# EAGLE board Stencil (EAGLE 8.3.2)

Size 25.4 x 25.4 mm. Coordinates in mm from the lower left corner, seen from the top.
Outline: 0,2.17 0,23.23 arc-90 2.17,25.4 23.23,25.4 arc-90 25.4,23.23 25.4,2.17 arc-90 23.23,0 2.17,0 arc-90 0,2.17
Copper layers (1*16): Top 0.035mm / dielectric 1.5mm / Bottom 0.035mm
Design rules "default": minimum track width 6mil, minimum drill 0.35mm, track to track 6mil, track to pad 6mil, pad to pad 6mil, via to via 6mil, smd to smd 6mil, copper to edge 40mil, drill to drill 6mil, minimum pad ring 10mil, minimum via ring 8mil, stop-mask expansion 4mil, vias tented up to drill 0mil, thermal gap 10mil
Holes 5.08 mm at 20.32,20.32 52.07,20.32 52.07,52.07 20.32,52.07 83.82,20.32 83.82,52.07 115.57,20.32 115.57,52.07 147.32,20.32 147.32,52.07 179.07,20.32 179.07,52.07 210.82,20.32 210.82,52.07 242.57,20.32 242.57,52.07 274.32,20.32 274.32,52.07 306.07,20.32 306.07,52.07 52.07,83.82 20.32,83.82 83.82,83.82 115.57,83.82 147.32,83.82 179.07,83.82 210.82,83.82 242.57,83.82 274.32,83.82 306.07,83.82 52.07,115.57 20.32,115.57 83.82,115.57 115.57,115.57 147.32,115.57 179.07,115.57 210.82,115.57 242.57,115.57 274.32,115.57 306.07,115.57 52.07,147.32 20.32,147.32 83.82,147.32 115.57,147.32 147.32,147.32 179.07,147.32 210.82,147.32 242.57,147.32 274.32,147.32 306.07,147.32

## Footprints (pad centres in the part's own frame; a part is rotated, then mirrored left to right if it is on the bottom)
D016_M = smd 2.5 x 0.7: 1 -2.45,4.445; 2 -2.45,3.175; 3 -2.45,1.905; 4 -2.45,0.635; 5 -2.45,-0.635; 6 -2.45,-1.905; 7 -2.45,-3.175; 8 -2.45,-4.445; 9 2.45,-4.445; 10 2.45,-3.175; 11 2.45,-1.905; 12 2.45,-0.635; 13 2.45,0.635; 14 2.45,1.905; 15 2.45,3.175; 16 2.45,4.445
DB024 = smd 0.4 x 2.15: 1 -3.575,-3.275; 2 -2.925,-3.275; 3 -2.275,-3.275; 4 -1.625,-3.275; 5 -0.975,-3.275; 6 -0.325,-3.275; 7 0.325,-3.275; 8 0.975,-3.275; 9 1.625,-3.275; 10 2.275,-3.275; 11 2.925,-3.275; 12 3.575,-3.275; 13 3.575,3.275; 14 2.925,3.275; 15 2.275,3.275; 16 1.625,3.275; 17 0.975,3.275; 18 0.325,3.275; 19 -0.325,3.275; 20 -0.975,3.275; 21 -1.625,3.275; 22 -2.275,3.275; 23 -2.925,3.275; 24 -3.575,3.275
DBQ024 = smd 0.4 x 1.95: 1 -3.52,-2.6; 2 -2.88,-2.6; 3 -2.24,-2.6; 4 -1.6,-2.6; 5 -0.96,-2.6; 6 -0.32,-2.6; 7 0.32,-2.6; 8 0.96,-2.6; 9 1.6,-2.6; 10 2.24,-2.6; 11 2.88,-2.6; 12 3.52,-2.6; 13 3.52,2.6; 14 2.88,2.6; 15 2.24,2.6; 16 1.6,2.6; 17 0.96,2.6; 18 0.32,2.6; 19 -0.32,2.6; 20 -0.96,2.6; 21 -1.6,2.6; 22 -2.24,2.6; 23 -2.88,2.6; 24 -3.52,2.6
DBT28 = smd 0.3 x 1.65: 1 -3.25,-2.775; 2 -2.75,-2.775; 3 -2.25,-2.775; 4 -1.75,-2.775; 5 -1.25,-2.775; 6 -0.75,-2.775; 7 -0.25,-2.775; 8 0.25,-2.775; 9 0.75,-2.775; 10 1.25,-2.775; 11 1.75,-2.775; 12 2.25,-2.775; 13 2.75,-2.775; 14 3.25,-2.775; 15 3.25,2.775; 16 2.75,2.775; 17 2.25,2.775; 18 1.75,2.775; 19 1.25,2.775; 20 0.75,2.775; 21 0.25,2.775; 22 -0.25,2.775; 23 -0.75,2.775; 24 -1.25,2.775; 25 -1.75,2.775; 26 -2.25,2.775; 27 -2.75,2.775; 28 -3.25,2.775
DGG048 = smd 0.3 x 1.65: 1 -5.75,-3.625; 2 -5.25,-3.625; 3 -4.75,-3.625; 4 -4.25,-3.625; 5 -3.75,-3.625; 6 -3.25,-3.625; 7 -2.75,-3.625; 8 -2.25,-3.625; 9 -1.75,-3.625; 10 -1.25,-3.625; 11 -0.75,-3.625; 12 -0.25,-3.625; 13 0.25,-3.625; 14 0.75,-3.625; 15 1.25,-3.625; 16 1.75,-3.625; 17 2.25,-3.625; 18 2.75,-3.625; 19 3.25,-3.625; 20 3.75,-3.625; 21 4.25,-3.625; 22 4.75,-3.625; 23 5.25,-3.625; 24 5.75,-3.625; 25 5.75,3.625; 26 5.25,3.625; 27 4.75,3.625; 28 4.25,3.625; 29 3.75,3.625; 30 3.25,3.625; 31 2.75,3.625; 32 2.25,3.625; 33 1.75,3.625; 34 1.25,3.625; 35 0.75,3.625; 36 0.25,3.625; 37 -0.25,3.625; 38 -0.75,3.625; 39 -1.25,3.625; 40 -1.75,3.625; 41 -2.25,3.625; 42 -2.75,3.625; 43 -3.25,3.625; 44 -3.75,3.625; 45 -4.25,3.625; 46 -4.75,3.625; 47 -5.25,3.625; 48 -5.75,3.625
DGV048 = smd 0.25 x 1.65: 1 -4.6,-2.775; 2 -4.2,-2.775; 3 -3.8,-2.775; 4 -3.4,-2.775; 5 -3,-2.775; 6 -2.6,-2.775; 7 -2.2,-2.775; 8 -1.8,-2.775; 9 -1.4,-2.775; 10 -1,-2.775; 11 -0.6,-2.775; 12 -0.2,-2.775; 13 0.2,-2.775; 14 0.6,-2.775; 15 1,-2.775; 16 1.4,-2.775; 17 1.8,-2.775; 18 2.2,-2.775; 19 2.6,-2.775; 20 3,-2.775; 21 3.4,-2.775; 22 3.8,-2.775; 23 4.2,-2.775; 24 4.6,-2.775; 25 4.6,2.775; 26 4.2,2.775; 27 3.8,2.775; 28 3.4,2.775; 29 3,2.775; 30 2.6,2.775; 31 2.2,2.775; 32 1.8,2.775; 33 1.4,2.775; 34 1,2.775; 35 0.6,2.775; 36 0.2,2.775; 37 -0.2,2.775; 38 -0.6,2.775; 39 -1,2.775; 40 -1.4,2.775; 41 -1.8,2.775; 42 -2.2,2.775; 43 -2.6,2.775; 44 -3,2.775; 45 -3.4,2.775; 46 -3.8,2.775; 47 -4.2,2.775; 48 -4.6,2.775
WSON8-6X5MM = smd 0.5 x 1.4: 1 -1.905,-3; 2 -0.635,-3; 3 0.635,-3; 4 1.905,-3; 5 1.905,3; 6 0.635,3; 7 -0.635,3; 8 -1.905,3 | smd 4.3 x 3.4: EP 0,0
DL028 = smd 0.4 x 2.2: 1 -4.128,-4.7; 2 -3.493,-4.7; 3 -2.857,-4.7; 4 -2.223,-4.7; 5 -1.587,-4.7; 6 -0.953,-4.7; 7 -0.318,-4.7; 8 0.318,-4.7; 9 0.953,-4.7; 10 1.587,-4.7; 11 2.223,-4.7; 12 2.857,-4.7; 13 3.493,-4.7; 14 4.128,-4.7; 15 4.128,4.7; 16 3.493,4.7; 17 2.857,4.7; 18 2.223,4.7; 19 1.587,4.7; 20 0.953,4.7; 21 0.318,4.7; 22 -0.318,4.7; 23 -0.953,4.7; 24 -1.587,4.7; 25 -2.223,4.7; 26 -2.857,4.7; 27 -3.493,4.7; 28 -4.128,4.7
R0402 = smd 0.7 x 0.9: 1 -0.65,0; 2 0.65,0
CRYSTAL-SMD-2.0X1.6MM = smd 0.75 x 0.7: 1 -0.675,-0.5; 2 0.675,-0.5; 3 0.675,0.5; 4 -0.675,0.5
FN28_M = smd 0.7 x 2.6: 1 0,5.6; 2 -1.27,5.6; 3 -2.54,5.6; 4 -3.81,5.6; 12 -3.81,-5.6; 13 -2.54,-5.6; 14 -1.27,-5.6; 15 0,-5.6; 16 1.27,-5.6; 17 2.54,-5.6; 18 3.81,-5.6; 26 3.81,5.6; 27 2.54,5.6; 28 1.27,5.6 | smd 2.6 x 0.7: 5 -5.6,3.81; 6 -5.6,2.54; 7 -5.6,1.27; 8 -5.6,0; 9 -5.6,-1.27; 10 -5.6,-2.54; 11 -5.6,-3.81; 19 5.6,-3.81; 20 5.6,-2.54; 21 5.6,-1.27; 22 5.6,0; 23 5.6,1.27; 24 5.6,2.54; 25 5.6,3.81
CRYSTAL-SMD-3.2X2.5MM = smd 1.2 x 1.1: 1 -1.175,-0.875; 2 1.175,-0.875; 3 1.175,0.875; 4 -1.175,0.875
CRYSTAL-SMD-5X3.2-4PAD = smd 1.9 x 1.1: 1 -1.85,-1.15; 2 1.85,-1.15; 3 1.85,1.15; 4 -1.85,1.15
HC49UP = smd 5.334 x 1.93: 1 -4.826,0; 2 4.826,0
RESONATOR-SMD-7.4X3.4 = smd 1.7 x 4: 1 -2.5,0; 3 2.5,0 | smd 1.5 x 4: 2 0,0
PBS32_M = smd 2.1 x 0.3: 1 -3.1,1.75; 2 -3.1,1.25; 3 -3.1,0.75; 4 -3.1,0.25; 5 -3.1,-0.25; 6 -3.1,-0.75; 7 -3.1,-1.25; 8 -3.1,-1.75; 17 3.1,-1.75; 18 3.1,-1.25; 19 3.1,-0.75; 20 3.1,-0.25; 21 3.1,0.25; 22 3.1,0.75; 23 3.1,1.25; 24 3.1,1.75 | smd 0.3 x 2.1: 9 -1.75,-3.1; 10 -1.25,-3.1; 11 -0.75,-3.1; 12 -0.25,-3.1; 13 0.25,-3.1; 14 0.75,-3.1; 15 1.25,-3.1; 16 1.75,-3.1; 25 1.75,3.1; 26 1.25,3.1; 27 0.75,3.1; 28 0.25,3.1; 29 -0.25,3.1; 30 -0.75,3.1; 31 -1.25,3.1; 32 -1.75,3.1
RESONATOR-SMD-4.5X2.0 = smd 0.4 x 1.6: 1 -1.5,0; 2 0,0; 3 1.5,0
RESONATOR-SMD-3.2X1.3 = smd 0.45 x 1.905: 1 -1.2,0; 2 0,0; 3 1.2,0
QFN-32 = smd 0.285 x 0.8: 1 -1.75,-2.5; 2 -1.25,-2.5; 3 -0.75,-2.5; 4 -0.25,-2.5; 5 0.25,-2.5; 6 0.75,-2.5; 7 1.25,-2.5; 8 1.75,-2.5; 17 1.75,2.5; 18 1.25,2.5; 19 0.75,2.5; 20 0.25,2.5; 21 -0.25,2.5; 22 -0.75,2.5; 23 -1.25,2.5; 24 -1.75,2.5 | smd 0.8 x 0.285: 9 2.5,-1.75; 10 2.5,-1.25; 11 2.5,-0.75; 12 2.5,-0.25; 13 2.5,0.25; 14 2.5,0.75; 15 2.5,1.25; 16 2.5,1.75; 25 -2.5,1.75; 26 -2.5,1.25; 27 -2.5,0.75; 28 -2.5,0.25; 29 -2.5,-0.25; 30 -2.5,-0.75; 31 -2.5,-1.25; 32 -2.5,-1.75 | smd 3.15 x 3.15: EP 0,0
PFP80_M = smd 2.1 x 0.3: 1 -6.6,4.75; 2 -6.6,4.25; 3 -6.6,3.75; 4 -6.6,3.25; 5 -6.6,2.75; 6 -6.6,2.25; 7 -6.6,1.75; 8 -6.6,1.25; 9 -6.6,0.75; 10 -6.6,0.25; 11 -6.6,-0.25; 12 -6.6,-0.75; 13 -6.6,-1.25; 14 -6.6,-1.75; 15 -6.6,-2.25; 16 -6.6,-2.75; 17 -6.6,-3.25; 18 -6.6,-3.75; 19 -6.6,-4.25; 20 -6.6,-4.75; 41 6.6,-4.75; 42 6.6,-4.25; 43 6.6,-3.75; 44 6.6,-3.25; 45 6.6,-2.75; 46 6.6,-2.25; 47 6.6,-1.75; 48 6.6,-1.25; 49 6.6,-0.75; 50 6.6,-0.25; 51 6.6,0.25; 52 6.6,0.75; 53 6.6,1.25; 54 6.6,1.75; 55 6.6,2.25; 56 6.6,2.75; 57 6.6,3.25; 58 6.6,3.75; 59 6.6,4.25; 60 6.6,4.75 | smd 0.3 x 2.1: 21 -4.75,-6.6; 22 -4.25,-6.6; 23 -3.75,-6.6; 24 -3.25,-6.6; 25 -2.75,-6.6; 26 -2.25,-6.6; 27 -1.75,-6.6; 28 -1.25,-6.6; 29 -0.75,-6.6; 30 -0.25,-6.6; 31 0.25,-6.6; 32 0.75,-6.6; 33 1.25,-6.6; 34 1.75,-6.6; 35 2.25,-6.6; 36 2.75,-6.6; 37 3.25,-6.6; 38 3.75,-6.6; 39 4.25,-6.6; 40 4.75,-6.6; 61 4.75,6.6; 62 4.25,6.6; 63 3.75,6.6; 64 3.25,6.6; 65 2.75,6.6; 66 2.25,6.6; 67 1.75,6.6; 68 1.25,6.6; 69 0.75,6.6; 70 0.25,6.6; 71 -0.25,6.6; 72 -0.75,6.6; 73 -1.25,6.6; 74 -1.75,6.6; 75 -2.25,6.6; 76 -2.75,6.6; 77 -3.25,6.6; 78 -3.75,6.6; 79 -4.25,6.6; 80 -4.75,6.6 | smd 10 x 10: 81 0,0
QFN-40 = smd 0.285 x 0.8: 1 -2.25,-3; 2 -1.75,-3; 3 -1.25,-3; 4 -0.75,-3; 5 -0.25,-3; 6 0.25,-3; 7 0.75,-3; 8 1.25,-3; 9 1.75,-3; 10 2.25,-3; 21 2.25,3; 22 1.75,3; 23 1.25,3; 24 0.75,3; 25 0.25,3; 26 -0.25,3; 27 -0.75,3; 28 -1.25,3; 29 -1.75,3; 30 -2.25,3 | smd 0.8 x 0.285: 11 3,-2.25; 12 3,-1.75; 13 3,-1.25; 14 3,-0.75; 15 3,-0.25; 16 3,0.25; 17 3,0.75; 18 3,1.25; 19 3,1.75; 20 3,2.25; 31 -3,2.25; 32 -3,1.75; 33 -3,1.25; 34 -3,0.75; 35 -3,0.25; 36 -3,-0.25; 37 -3,-0.75; 38 -3,-1.25; 39 -3,-1.75; 40 -3,-2.25 | smd 4.4 x 4.4: EP 0,0
PM064_M = smd 2.1 x 0.3: 1 -5.6,3.75; 2 -5.6,3.25; 3 -5.6,2.75; 4 -5.6,2.25; 5 -5.6,1.75; 6 -5.6,1.25; 7 -5.6,0.75; 8 -5.6,0.25; 9 -5.6,-0.25; 10 -5.6,-0.75; 11 -5.6,-1.25; 12 -5.6,-1.75; 13 -5.6,-2.25; 14 -5.6,-2.75; 15 -5.6,-3.25; 16 -5.6,-3.75; 33 5.6,-3.75; 34 5.6,-3.25; 35 5.6,-2.75; 36 5.6,-2.25; 37 5.6,-1.75; 38 5.6,-1.25; 39 5.6,-0.75; 40 5.6,-0.25; 41 5.6,0.25; 42 5.6,0.75; 43 5.6,1.25; 44 5.6,1.75; 45 5.6,2.25; 46 5.6,2.75; 47 5.6,3.25; 48 5.6,3.75 | smd 0.3 x 2.1: 17 -3.75,-5.6; 18 -3.25,-5.6; 19 -2.75,-5.6; 20 -2.25,-5.6; 21 -1.75,-5.6; 22 -1.25,-5.6; 23 -0.75,-5.6; 24 -0.25,-5.6; 25 0.25,-5.6; 26 0.75,-5.6; 27 1.25,-5.6; 28 1.75,-5.6; 29 2.25,-5.6; 30 2.75,-5.6; 31 3.25,-5.6; 32 3.75,-5.6; 49 3.75,5.6; 50 3.25,5.6; 51 2.75,5.6; 52 2.25,5.6; 53 1.75,5.6; 54 1.25,5.6; 55 0.75,5.6; 56 0.25,5.6; 57 -0.25,5.6; 58 -0.75,5.6; 59 -1.25,5.6; 60 -1.75,5.6; 61 -2.25,5.6; 62 -2.75,5.6; 63 -3.25,5.6; 64 -3.75,5.6
QFN-44 = smd 0.8 x 0.3: 1 -3.4,2.5; 2 -3.4,2; 3 -3.4,1.5; 4 -3.4,1; 5 -3.4,0.5; 6 -3.4,0; 7 -3.4,-0.5; 8 -3.4,-1; 9 -3.4,-1.5; 10 -3.4,-2; 11 -3.4,-2.5; 23 3.4,-2.5; 24 3.4,-2; 25 3.4,-1.5; 26 3.4,-1; 27 3.4,-0.5; 28 3.4,0; 29 3.4,0.5; 30 3.4,1; 31 3.4,1.5; 32 3.4,2; 33 3.4,2.5 | smd 0.3 x 0.8: 12 -2.5,-3.4; 13 -2,-3.4; 14 -1.5,-3.4; 15 -1,-3.4; 16 -0.5,-3.4; 17 0,-3.4; 18 0.5,-3.4; 19 1,-3.4; 20 1.5,-3.4; 21 2,-3.4; 22 2.5,-3.4; 34 2.5,3.4; 35 2,3.4; 36 1.5,3.4; 37 1,3.4; 38 0.5,3.4; 39 0,3.4; 40 -0.5,3.4; 41 -1,3.4; 42 -1.5,3.4; 43 -2,3.4; 44 -2.5,3.4
PT48_M = smd 2.1 x 0.3: 1 -4.1,2.75; 2 -4.1,2.25; 3 -4.1,1.75; 4 -4.1,1.25; 5 -4.1,0.75; 6 -4.1,0.25; 7 -4.1,-0.25; 8 -4.1,-0.75; 9 -4.1,-1.25; 10 -4.1,-1.75; 11 -4.1,-2.25; 12 -4.1,-2.75; 25 4.1,-2.75; 26 4.1,-2.25; 27 4.1,-1.75; 28 4.1,-1.25; 29 4.1,-0.75; 30 4.1,-0.25; 31 4.1,0.25; 32 4.1,0.75; 33 4.1,1.25; 34 4.1,1.75; 35 4.1,2.25; 36 4.1,2.75 | smd 0.3 x 2.1: 13 -2.75,-4.1; 14 -2.25,-4.1; 15 -1.75,-4.1; 16 -1.25,-4.1; 17 -0.75,-4.1; 18 -0.25,-4.1; 19 0.25,-4.1; 20 0.75,-4.1; 21 1.25,-4.1; 22 1.75,-4.1; 23 2.25,-4.1; 24 2.75,-4.1; 37 2.75,4.1; 38 2.25,4.1; 39 1.75,4.1; 40 1.25,4.1; 41 0.75,4.1; 42 0.25,4.1; 43 -0.25,4.1; 44 -0.75,4.1; 45 -1.25,4.1; 46 -1.75,4.1; 47 -2.25,4.1; 48 -2.75,4.1
PW028 = smd 0.3 x 1.65: 1 -4.225,-2.775; 2 -3.575,-2.775; 3 -2.925,-2.775; 4 -2.275,-2.775; 5 -1.625,-2.775; 6 -0.975,-2.775; 7 -0.325,-2.775; 8 0.325,-2.775; 9 0.975,-2.775; 10 1.625,-2.775; 11 2.275,-2.775; 12 2.925,-2.775; 13 3.575,-2.775; 14 4.225,-2.775; 15 4.225,2.775; 16 3.575,2.775; 17 2.925,2.775; 18 2.275,2.775; 19 1.625,2.775; 20 0.975,2.775; 21 0.325,2.775; 22 -0.325,2.775; 23 -0.975,2.775; 24 -1.625,2.775; 25 -2.275,2.775; 26 -2.925,2.775; 27 -3.575,2.775; 28 -4.225,2.775
QFN-44-NOPAD = smd 0.8 x 0.3: 1 -3.4,2.5; 2 -3.4,2; 3 -3.4,1.5; 4 -3.4,1; 5 -3.4,0.5; 6 -3.4,0; 7 -3.4,-0.5; 8 -3.4,-1; 9 -3.4,-1.5; 10 -3.4,-2; 11 -3.4,-2.5; 23 3.4,-2.5; 24 3.4,-2; 25 3.4,-1.5; 26 3.4,-1; 27 3.4,-0.5; 28 3.4,0; 29 3.4,0.5; 30 3.4,1; 31 3.4,1.5; 32 3.4,2; 33 3.4,2.5 | smd 0.3 x 0.8: 12 -2.5,-3.4; 13 -2,-3.4; 14 -1.5,-3.4; 15 -1,-3.4; 16 -0.5,-3.4; 17 0,-3.4; 18 0.5,-3.4; 19 1,-3.4; 20 1.5,-3.4; 21 2,-3.4; 22 2.5,-3.4; 34 2.5,3.4; 35 2,3.4; 36 1.5,3.4; 37 1,3.4; 38 0.5,3.4; 39 0,3.4; 40 -0.5,3.4; 41 -1,3.4; 42 -1.5,3.4; 43 -2,3.4; 44 -2.5,3.4
RC052_M = smd 2.25 x 0.45: 1 -6.2,3.9; 2 -6.2,3.25; 3 -6.2,2.6; 4 -6.2,1.95; 5 -6.2,1.3; 6 -6.2,0.65; 7 -6.2,0; 8 -6.2,-0.65; 9 -6.2,-1.3; 10 -6.2,-1.95; 11 -6.2,-2.6; 12 -6.2,-3.25; 13 -6.2,-3.9; 27 6.2,-3.9; 28 6.2,-3.25; 29 6.2,-2.6; 30 6.2,-1.95; 31 6.2,-1.3; 32 6.2,-0.65; 33 6.2,0; 34 6.2,0.65; 35 6.2,1.3; 36 6.2,1.95; 37 6.2,2.6; 38 6.2,3.25; 39 6.2,3.9 | smd 0.45 x 2.25: 14 -3.9,-6.2; 15 -3.25,-6.2; 16 -2.6,-6.2; 17 -1.95,-6.2; 18 -1.3,-6.2; 19 -0.65,-6.2; 20 0,-6.2; 21 0.65,-6.2; 22 1.3,-6.2; 23 1.95,-6.2; 24 2.6,-6.2; 25 3.25,-6.2; 26 3.9,-6.2; 40 3.9,6.2; 41 3.25,6.2; 42 2.6,6.2; 43 1.95,6.2; 44 1.3,6.2; 45 0.65,6.2; 46 0,6.2; 47 -0.65,6.2; 48 -1.3,6.2; 49 -1.95,6.2; 50 -2.6,6.2; 51 -3.25,6.2; 52 -3.9,6.2
RGE24_M = smd 0.9 x 0.25: 1 -2.05,1.25; 2 -2.05,0.75; 3 -2.05,0.25; 4 -2.05,-0.25; 5 -2.05,-0.75; 6 -2.05,-1.25; 13 2.05,-1.25; 14 2.05,-0.75; 15 2.05,-0.25; 16 2.05,0.25; 17 2.05,0.75; 18 2.05,1.25 | smd 0.25 x 0.9: 7 -1.25,-2.05; 8 -0.75,-2.05; 9 -0.25,-2.05; 10 0.25,-2.05; 11 0.75,-2.05; 12 1.25,-2.05; 19 1.25,2.05; 20 0.75,2.05; 21 0.25,2.05; 22 -0.25,2.05; 23 -0.75,2.05; 24 -1.25,2.05 | smd 2.6 x 2.6: 25 0,0
RGV16_M = smd 1 x 0.3: 1 -2,0.975; 2 -2,0.325; 3 -2,-0.325; 4 -2,-0.975; 9 2,-0.975; 10 2,-0.325; 11 2,0.325; 12 2,0.975 | smd 0.3 x 1: 5 -0.975,-2; 6 -0.325,-2; 7 0.325,-2; 8 0.975,-2; 13 0.975,2; 14 0.325,2; 15 -0.325,2; 16 -0.975,2 | smd 2.3 x 2.3: 17 0,0
RGW20_M = smd 1.15 x 0.3: 1 -2.425,1.3; 2 -2.425,0.65; 3 -2.425,0; 4 -2.425,-0.65; 5 -2.425,-1.3; 11 2.425,-1.3; 12 2.425,-0.65; 13 2.425,0; 14 2.425,0.65; 15 2.425,1.3 | smd 0.3 x 1.15: 6 -1.3,-2.425; 7 -0.65,-2.425; 8 0,-2.425; 9 0.65,-2.425; 10 1.3,-2.425; 16 1.3,2.425; 17 0.65,2.425; 18 0,2.425; 19 -0.65,2.425; 20 -1.3,2.425 | smd 3.3 x 3.3: 21 0,0
RSA16_M = smd 0.85 x 0.3: 1 -2.075,0.975; 2 -2.075,0.325; 3 -2.075,-0.325; 4 -2.075,-0.975; 9 2.075,-0.975; 10 2.075,-0.325; 11 2.075,0.325; 12 2.075,0.975 | smd 0.3 x 0.85: 5 -0.975,-2.075; 6 -0.325,-2.075; 7 0.325,-2.075; 8 0.975,-2.075; 13 0.975,2.075; 14 0.325,2.075; 15 -0.325,2.075; 16 -0.975,2.075 | smd 2.8 x 2.8: 17 0,0
QFN-48 = smd 0.7 x 0.25: 1 -3.4,2.75; 2 -3.4,2.25; 3 -3.4,1.75; 4 -3.4,1.25; 5 -3.4,0.75; 6 -3.4,0.25; 7 -3.4,-0.25; 8 -3.4,-0.75; 9 -3.4,-1.25; 10 -3.4,-1.75; 11 -3.4,-2.25; 12 -3.4,-2.75; 25 3.4,-2.75; 26 3.4,-2.25; 27 3.4,-1.75; 28 3.4,-1.25; 29 3.4,-0.75; 30 3.4,-0.25; 31 3.4,0.25; 32 3.4,0.75; 33 3.4,1.25; 34 3.4,1.75; 35 3.4,2.25; 36 3.4,2.75 | smd 0.25 x 0.7: 13 -2.75,-3.4; 14 -2.25,-3.4; 15 -1.75,-3.4; 16 -1.25,-3.4; 17 -0.75,-3.4; 18 -0.25,-3.4; 19 0.25,-3.4; 20 0.75,-3.4; 21 1.25,-3.4; 22 1.75,-3.4; 23 2.25,-3.4; 24 2.75,-3.4; 37 2.75,3.4; 38 2.25,3.4; 39 1.75,3.4; 40 1.25,3.4; 41 0.75,3.4; 42 0.25,3.4; 43 -0.25,3.4; 44 -0.75,3.4; 45 -1.25,3.4; 46 -1.75,3.4; 47 -2.25,3.4; 48 -2.75,3.4 | smd 5.15 x 5.15: EP 0,0
APDS-9960 = smd 0.6 x 0.72: 1 0.7,1.455; 2 0.7,0.485; 3 0.7,-0.485; 4 0.7,-1.455; 5 -0.7,-1.455; 6 -0.7,-0.485; 7 -0.7,0.485; 8 -0.7,1.455
BGA8DS = smd 0.305 x 0.305: A1 0.5,-0.5; A2 0,-0.5; A3 -0.5,-0.5; B1 0.5,0; B3 -0.5,0; C1 0.5,0.5; C2 0,0.5; C3 -0.5,0.5
CHIPLED-6 = smd 1.1 x 0.6: P1 1.1,1; P2 -1.1,1; P4 -1.1,-1; P5 1.1,-1 | smd 1.1 x 0.7: P3 -1.1,0; P6 1.1,0
WA014 = smd 0.65 x 2.2: 1 -3.81,-4; 2 -2.54,-4; 3 -1.27,-4; 4 0,-4; 5 1.27,-4; 6 2.54,-4; 7 3.81,-4; 8 3.81,4; 9 2.54,4; 10 1.27,4; 11 0,4; 12 -1.27,4; 13 -2.54,4; 14 -3.81,4
16LCSP = smd 0.7 x 0.35: 1 -1.825,0.975; 2 -1.825,0.325; 3 -1.825,-0.325; 4 -1.825,-0.975; 9 1.825,-0.975; 10 1.825,-0.325; 11 1.825,0.325; 12 1.825,0.975 | smd 0.35 x 0.7: 5 -0.975,-1.85; 6 -0.35,-1.85; 7 0.325,-1.85; 8 0.975,-1.85; 13 0.975,1.825; 14 0.325,1.825; 15 -0.325,1.825; 16 -0.975,1.825
085CS_1AR = smd 2.9 x 2.5: + 3.25,0; - -3.25,0
085CS_1R = smd 2.9 x 2.5: + 4.75,0; - -4.75,0
140CLH-0810 = smd 3.5 x 2.5: + 3.25,0; - -3.25,0
140CLH-1010 = smd 4.3 x 2.5: + 4.15,0; - -4.15,0
R0805 = smd 1.1 x 1.4: 1 -1,0; 2 1,0
CHIPLED_0805 = smd 1.2 x 1.2: A 0,-1.05; C 0,1.05
DFN-10 = smd 0.762 x 0.279: 1 -0.91,0.787; 2 -0.91,0.381; 3 -0.91,0; 4 -0.91,-0.406; 5 -0.91,-0.787; 6 0.91,-0.787; 7 0.91,-0.406; 8 0.91,0; 9 0.91,0.381; 10 0.91,0.787
HIH-4030 = smd 0.508 x 1.778: 1 -1.27,-5.08; 2 0,-5.08; 3 1.27,-5.08 | smd 2.54 x 2.286: NC 0,5.842
153CLV-0405 = smd 2.6 x 1.6: + 1.8,0; - -1.8,0
153CLV-0505 = smd 3 x 1.6: + 2.2,0; - -2.2,0
153CLV-0605 = smd 3.5 x 1.6: + 2.7,0; - -2.7,0
LCC-8 = smd 1.5 x 0.64: P$1 -1.96,1.26; P$2 -1.96,0; P$3 -1.96,-1.26; P$5 1.96,-1.26; P$6 1.96,0; P$7 1.96,1.26 | smd 0.64 x 1.5: P$4 0,-1.96 | smd 0.64 x 1.27: P$8 0.01,1.9
1812 = smd 2.286 x 2.794: 1 -2.046,0; 2 2.046,0
LFCSP-16-3X3 = smd 0.4 x 0.25: 1 -1.3,0.75; 2 -1.3,0.25; 3 -1.3,-0.25; 4 -1.3,-0.75; 9 1.3,-0.75; 10 1.3,-0.25; 11 1.3,0.25; 12 1.3,0.75 | smd 0.25 x 0.4: 5 -0.75,-1.3; 6 -0.25,-1.3; 7 0.25,-1.3; 8 0.75,-1.3; 13 0.75,1.3; 14 0.25,1.3; 15 -0.25,1.3; 16 -0.75,1.3 | smd 1.6 x 1.6: EXP 0,0
A/3216-18R = smd 1.95 x 1.5: + 1.375,0; - -1.375,0
B/3528-21R = smd 1.95 x 2.5: + 1.525,0; - -1.525,0
B/3528-21W = smd 2.15 x 1.8: + 1.625,0; - -1.625,0
BMP085 = smd 1.67 x 0.8: P$1 -2.065,1.27; P$2 -2.065,0; P$3 -2.065,-1.27; P$5 2.065,-1.27; P$6 2.065,0; P$7 2.065,1.27 | smd 0.8 x 1.67: P$4 0,-2.065 | smd 0.8 x 2.5: P$8 0,1.65
BTN_CK_KSS = smd 1.7 x 3.7: P$1 -2.95,0; P$2 2.95,0
C/6032-28R = smd 2.55 x 2.5: + 2.525,0; - -2.525,0
LFCSP-16-4X4 = smd 1.75 x 1.75: 0 0,0 | smd 0.65 x 0.37: 1 -1.75,0.975; 2 -1.75,0.325; 3 -1.75,-0.325; 4 -1.75,-0.975; 9 1.75,-0.975; 10 1.75,-0.325; 11 1.75,0.325; 12 1.75,0.975 | smd 0.37 x 0.65: 5 -0.975,-1.75; 6 -0.325,-1.75; 7 0.325,-1.75; 8 0.975,-1.75; 13 0.975,1.75; 14 0.325,1.75; 15 -0.325,1.75; 16 -0.975,1.75
LGA-8-2.5X2.5 = smd 0.35 x 0.5: 1 -0.975,1.025; 2 -0.325,1.025; 3 0.325,1.025; 4 0.975,1.025; 5 0.975,-1.025; 6 0.325,-1.025; 7 -0.325,-1.025; 8 -0.975,-1.025
C1310 = smd 1 x 1.3: 1 -0.7,0; 2 0.7,0
LGA-12 = smd 0.375 x 0.35: 1 -0.75,0.75; 2 -0.75,0.25; 3 -0.75,-0.25; 4 -0.75,-0.75; 7 0.75,-0.75; 8 0.75,-0.25; 9 0.75,0.25; 10 0.75,0.75 | smd 0.35 x 0.375: 5 -0.25,-0.75; 6 0.25,-0.75; 11 0.25,0.75; 12 -0.25,0.75
C1812 = smd 1.9 x 3.4: 1 -1.95,0; 2 1.95,0
TEMT6000 = smd 1.1 x 0.8: BASE -1.87,-0.65; EMITTER -1.87,0.65 | smd 1.1 x 1: COLLECTOR 1.86,0.01
T5403 = smd 0.42 x 0.8: 1 -1.065,-0.625 | smd 0.42 x 0.55: 2 -0.355,-0.75; 3 0.355,-0.75; 4 1.065,-0.75; 5 1.065,0.75; 6 0.355,0.75; 7 -0.355,0.75; 8 -1.065,0.75
SOT23-3 = smd 0.8 x 0.9: 1 -0.95,-1; 2 0.95,-1; 3 0,1.1
C4532 = smd 1.9 x 3.4: 1 -1.95,0; 2 1.95,0
C4564 = smd 1.9 x 6.8: 1 -1.95,0; 2 1.95,0
CHIPLED_1206 = smd 1.5 x 1.5: A 0,-1.75; C 0,1.75
SHT1X = smd 1.8 x 0.8: 1 -2.667,1.905; 2 -2.667,0.635; 3 -2.667,-0.635; 4 -2.667,-1.905; 5 2.667,-1.905; 6 2.667,-0.635; 7 2.667,0.635; 8 2.667,1.905
CTS406 = smd 1.9 x 1.4: 1 -2.2,-1.2; 2 2.2,-1.2; 3 2.2,1.2; 4 -2.2,1.2
D/7343-31W = smd 2.95 x 2.7: + 3.375,0; - -3.375,0
D/7343-31R = smd 2.55 x 2.7: + 3.175,0; - -3.175,0
DFN-6 = smd 0.28 x 0.7: 1 -0.5,-0.988; 2 0,-0.988; 3 0.5,-0.988; 4 0.5,0.988; 5 0,0.988; 6 -0.5,0.988 | smd 1.1 x 0.7: P$1 0,0
LCC20 = smd 0.8 x 3.4: 1 0,3.8 | smd 0.8 x 2: 2 -1.27,4.5; 3 -2.54,4.5; 9 -2.54,-4.5; 10 -1.27,-4.5; 11 0,-4.5; 12 1.27,-4.5; 13 2.54,-4.5; 19 2.54,4.5; 20 1.27,4.5 | smd 2 x 0.8: 4 -4.5,2.54; 5 -4.5,1.27; 6 -4.5,0; 7 -4.5,-1.27; 8 -4.5,-2.54; 14 4.5,-2.54; 15 4.5,-1.27; 16 4.5,0; 17 4.5,1.27; 18 4.5,2.54
MC14093B-TSSOP14 = smd 0.36 x 1.26: 1 -1.95,-2.925; 2 -1.3,-2.925; 3 -0.65,-2.925; 4 0,-2.925; 5 0.65,-2.925; 6 1.3,-2.925; 7 1.95,-2.925; 8 1.95,2.925; 9 1.3,2.925; 10 0.65,2.925; 11 0,2.925; 12 -0.65,2.925; 13 -1.3,2.925; 14 -1.95,2.925
MM20SS = smd 1.27 x 1.88: 1 -2.794,-1.524; 2 2.794,-1.524; 3 2.794,1.524; 4 -2.794,1.524
MM39SL = smd 1.778 x 1.778: 1 -4.699,-1.778; 2 4.699,-1.778; 3 4.699,1.778; 4 -4.699,1.778
MSOP10 = smd 0.25 x 1: 1 -1,-2.113; 2 -0.5,-2.113; 3 0,-2.113; 4 0.5,-2.113; 5 1,-2.113; 6 1,2.113; 7 0.5,2.113; 8 0,2.113; 9 -0.5,2.113; 10 -1,2.113
PUSHBUTTON_SMD_SJ = smd 2 x 2: P$1 3,0; P$2 -3,0
QFN28-ML_6X6MM = smd 0.7 x 0.35: 1 -2.7,1.95; 2 -2.7,1.3; 3 -2.7,0.65; 4 -2.7,0; 5 -2.7,-0.65; 6 -2.7,-1.3; 7 -2.7,-1.95; 15 2.7,-1.95; 16 2.7,-1.3; 17 2.7,-0.65; 18 2.7,0; 19 2.7,0.65; 20 2.7,1.3; 21 2.7,1.95 | smd 0.35 x 0.7: 8 -1.95,-2.7; 9 -1.3,-2.7; 10 -0.65,-2.7; 11 0,-2.7; 12 0.65,-2.7; 13 1.3,-2.7; 14 1.95,-2.7; 22 1.95,2.7; 23 1.3,2.7; 24 0.65,2.7; 25 0,2.7; 26 -0.65,2.7; 27 -1.3,2.7; 28 -1.95,2.7 | smd 3.7 x 3.7: EXP 0,0
QFN20 = smd 0.75 x 0.3: 1 -2,1; 2 -2,0.5; 3 -2,0; 4 -2,-0.5; 5 -2,-1; 11 2,-1; 12 2,-0.5; 13 2,0; 14 2,0.5; 15 2,1 | smd 0.3 x 0.75: 6 -1,-2; 7 -0.5,-2; 8 0,-2; 9 0.5,-2; 10 1,-2; 16 1,2; 17 0.5,2; 18 0,2; 19 -0.5,2; 20 -1,2
R0603 = smd 1 x 1.1: 1 -0.85,0; 2 0.85,0
R2010 = smd 1.8 x 2.7: 1 -2.2,0; 2 2.2,0
R2512 = smd 1.8 x 3.2: 1 -2.8,0; 2 2.8,0
R3216 = smd 1.6 x 1.8: 1 -1.4,0; 2 1.4,0
R3225 = smd 1.6 x 2.7: 1 -1.4,0; 2 1.4,0
SO14 = smd 0.66 x 2.032: 1 -3.81,-3.073; 2 -2.54,-3.073; 3 -1.27,-3.073; 4 0,-3.073; 5 1.27,-3.073; 6 2.54,-3.073; 7 3.81,-3.073; 8 3.81,3.073; 9 2.54,3.073; 10 1.27,3.073; 11 0,3.073; 12 -1.27,3.073; 13 -2.54,3.073; 14 -3.81,3.073
CHIPLED_0603 = smd 0.8 x 0.8: A 0,-0.75; C 0,0.75
SO18W = smd 0.6 x 2.2: 1 -4.445,-4.6; 2 -3.175,-4.6; 3 -1.905,-4.6; 4 -0.635,-4.6; 5 0.635,-4.6; 6 1.905,-4.6; 7 3.175,-4.6; 8 4.445,-4.6; 9 5.715,-4.6; 10 5.775,4.6; 11 4.505,4.6; 12 3.235,4.6; 13 1.965,4.6; 14 0.695,4.6; 15 -0.575,4.6; 16 -1.845,4.6; 17 -3.145,4.6; 18 -4.445,4.6
SOT23 = smd 1 x 1.4: 1 -0.95,-1.1; 2 0.95,-1.1; 3 0,1.1
SOT23-5L = smd 0.55 x 1.2: 1 -0.95,-1.3; 2 0,-1.3; 3 0.95,-1.3; 4 0.95,1.3; 5 -0.95,1.3
SOT23-6 = smd 0.55 x 1.2: 1 -0.95,-1.3; 2 0,-1.3; 3 0.95,-1.3; 4 0.95,1.3; 5 0,1.3; 6 -0.95,1.3
SOT23-R = smd 0.6 x 0.7: 1 -0.95,-1; 2 0.95,-1; 3 0,1
SQFP-S-5X5-48 = smd 0.17 x 1.6: 1 -1.65,-3.1; 2 -1.35,-3.1; 3 -1.05,-3.1; 4 -0.75,-3.1; 5 -0.45,-3.1; 6 -0.15,-3.1; 7 0.15,-3.1; 8 0.45,-3.1; 9 0.75,-3.1; 10 1.05,-3.1; 11 1.35,-3.1; 12 1.65,-3.1; 25 1.65,3.1; 26 1.35,3.1; 27 1.05,3.1; 28 0.75,3.1; 29 0.45,3.1; 30 0.15,3.1; 31 -0.15,3.1; 32 -0.45,3.1; 33 -0.75,3.1; 34 -1.05,3.1; 35 -1.35,3.1; 36 -1.65,3.1 | smd 1.6 x 0.17: 13 3.1,-1.65; 14 3.1,-1.35; 15 3.1,-1.05; 16 3.1,-0.75; 17 3.1,-0.45; 18 3.1,-0.15; 19 3.1,0.15; 20 3.1,0.45; 21 3.1,0.75; 22 3.1,1.05; 23 3.1,1.35; 24 3.1,1.65; 37 -3.1,1.65; 38 -3.1,1.35; 39 -3.1,1.05; 40 -3.1,0.75; 41 -3.1,0.45; 42 -3.1,0.15; 43 -3.1,-0.15; 44 -3.1,-0.45; 45 -3.1,-0.75; 46 -3.1,-1.05; 47 -3.1,-1.35; 48 -3.1,-1.65
SQFP-S-7X7-48 = smd 0.3 x 1.6: 1 -2.75,-4.1; 2 -2.25,-4.1; 3 -1.75,-4.1; 4 -1.25,-4.1; 5 -0.75,-4.1; 6 -0.25,-4.1; 7 0.25,-4.1; 8 0.75,-4.1; 9 1.25,-4.1; 10 1.75,-4.1; 11 2.25,-4.1; 12 2.75,-4.1; 25 2.75,4.1; 26 2.25,4.1; 27 1.75,4.1; 28 1.25,4.1; 29 0.75,4.1; 30 0.25,4.1; 31 -0.25,4.1; 32 -0.75,4.1; 33 -1.25,4.1; 34 -1.75,4.1; 35 -2.25,4.1; 36 -2.75,4.1 | smd 1.6 x 0.3: 13 4.1,-2.75; 14 4.1,-2.25; 15 4.1,-1.75; 16 4.1,-1.25; 17 4.1,-0.75; 18 4.1,-0.25; 19 4.1,0.25; 20 4.1,0.75; 21 4.1,1.25; 22 4.1,1.75; 23 4.1,2.25; 24 4.1,2.75; 37 -4.1,2.75; 38 -4.1,2.25; 39 -4.1,1.75; 40 -4.1,1.25; 41 -4.1,0.75; 42 -4.1,0.25; 43 -4.1,-0.25; 44 -4.1,-0.75; 45 -4.1,-1.25; 46 -4.1,-1.75; 47 -4.1,-2.25; 48 -4.1,-2.75
SSOP28 = smd 0.4 x 1.5: 1 -4.225,-3.625; 2 -3.575,-3.625; 3 -2.925,-3.625; 4 -2.275,-3.625; 5 -1.625,-3.625; 6 -0.975,-3.625; 7 -0.325,-3.625; 8 0.325,-3.625; 9 0.975,-3.625; 10 1.625,-3.625; 11 2.275,-3.625; 12 2.925,-3.625; 13 3.575,-3.625; 14 4.225,-3.625; 15 4.225,3.625; 16 3.575,3.625; 17 2.925,3.625; 18 2.275,3.625; 19 1.625,3.625; 20 0.975,3.625; 21 0.325,3.625; 22 -0.325,3.625; 23 -0.975,3.625; 24 -1.625,3.625; 25 -2.275,3.625; 26 -2.925,3.625; 27 -3.575,3.625; 28 -4.225,3.625
TQFP44 = smd 1.5 x 0.5: 1 -5.8,4; 2 -5.8,3.2; 3 -5.8,2.4; 4 -5.8,1.6; 5 -5.8,0.8; 6 -5.8,0; 7 -5.8,-0.8; 8 -5.8,-1.6; 9 -5.8,-2.4; 10 -5.8,-3.2; 11 -5.8,-4; 23 5.8,-4; 24 5.8,-3.2; 25 5.8,-2.4; 26 5.8,-1.6; 27 5.8,-0.8; 28 5.8,0; 29 5.8,0.8; 30 5.8,1.6; 31 5.8,2.4; 32 5.8,3.2; 33 5.8,4 | smd 0.5 x 1.5: 12 -4,-5.8; 13 -3.2,-5.8; 14 -2.4,-5.8; 15 -1.6,-5.8; 16 -0.8,-5.8; 17 0,-5.8; 18 0.8,-5.8; 19 1.6,-5.8; 20 2.4,-5.8; 21 3.2,-5.8; 22 4,-5.8; 34 4,5.8; 35 3.2,5.8; 36 2.4,5.8; 37 1.6,5.8; 38 0.8,5.8; 39 0,5.8; 40 -0.8,5.8; 41 -1.6,5.8; 42 -2.4,5.8; 43 -3.2,5.8; 44 -4,5.8
TQFP32-08 = smd 1.27 x 0.508: 1 -4.293,2.8; 2 -4.293,2; 3 -4.293,1.2; 4 -4.293,0.4; 5 -4.293,-0.4; 6 -4.293,-1.2; 7 -4.293,-2; 8 -4.293,-2.8; 17 4.293,-2.8; 18 4.293,-2; 19 4.293,-1.2; 20 4.293,-0.4; 21 4.293,0.4; 22 4.293,1.2; 23 4.293,2; 24 4.293,2.8 | smd 0.508 x 1.27: 9 -2.8,-4.293; 10 -2,-4.293; 11 -1.2,-4.293; 12 -0.4,-4.293; 13 0.4,-4.293; 14 1.2,-4.293; 15 2,-4.293; 16 2.8,-4.293; 25 2.8,4.293; 26 2,4.293; 27 1.2,4.293; 28 0.4,4.293; 29 -0.4,4.293; 30 -1.2,4.293; 31 -2,4.293; 32 -2.8,4.293
TSSOP28 = smd 0.305 x 0.991: 1 -4.225,-2.918; 2 -3.575,-2.918; 3 -2.925,-2.918; 4 -2.275,-2.918; 5 -1.625,-2.918; 6 -0.975,-2.918; 7 -0.325,-2.918; 8 0.325,-2.918; 9 0.975,-2.918; 10 1.625,-2.918; 11 2.275,-2.918; 12 2.925,-2.918; 13 3.575,-2.918; 14 4.225,-2.918; 15 4.225,2.918; 16 3.575,2.918; 17 2.925,2.918; 18 2.275,2.918; 19 1.625,2.918; 20 0.975,2.918; 21 0.325,2.918; 22 -0.325,2.918; 23 -0.975,2.918; 24 -1.625,2.918; 25 -2.275,2.918; 26 -2.925,2.918; 27 -3.575,2.918; 28 -4.225,2.918
U.FL = smd 2.2 x 1.05: 1 0,1.375; 2 0,-1.375 | smd 0.8 x 1: 3 1.525,0
UMAX10 = smd 0.254 x 1.422: 1 -1.016,-2.159; 2 -0.508,-2.159; 3 0,-2.159; 4 0.508,-2.159; 5 1.016,-2.159; 6 1.016,2.159; 7 0.508,2.159; 8 0,2.159; 9 -0.508,2.159; 10 -1.016,2.159
USB-MINIB = smd 0.5 x 2.308: D+ 0,4.064; D- -0.8,4.064; GND 1.6,4.064; ID 0.8,4.064; VBUS -1.6,4.064 | smd 2 x 2.4: GND1 -4.4,-2; GND2 -4.4,3.5; GND3 4.4,3.5; GND4 4.4,-2 | hole 1: -2.2,1; 2.2,1
VFSOP-8 = smd 0.25 x 0.65: P$1 -0.75,-1.45; P$2 -0.25,-1.45; P$3 0.25,-1.45; P$4 0.75,-1.45; P$5 0.75,1.45; P$6 0.25,1.45; P$7 -0.25,1.45; P$8 -0.75,1.45
WS2812 = smd 2 x 1.1: DI 2,0; DO 2,-1.7; LEDVDD -2,0; NC -2,1.7; VDD 2,1.7; VSS -2,-1.7
WS2812B = smd 1.5 x 0.9: 1-VDD 2.45,-1.65; 2-DOUT 2.45,1.65; 3-GND -2.45,1.65; 4-DIN -2.45,-1.65
XTAL3215 = smd 1.1 x 1.9: P$1 1.2,0; P$2 -1.2,0

## Placement (x,y rotation side)
E$1  [D016_M]  8.26,73.66 0 top  (outside the outline)
E$2  [DB024]  9.53,40.64 90 top  (outside the outline)
E$3  [DB024]  9.53,10.16 270 top
E$4  [DBQ024]  8.89,104.14 90 top  (outside the outline)
E$5  [DBT28]  8.89,135.89 90 top  (outside the outline)
E$6  [DGG048]  40.64,138.43 90 top  (outside the outline)
E$7  [DGV048]  40.64,104.14 90 top  (outside the outline)
E$8  [WSON8-6X5MM]  146.05,69.85 90 top  (outside the outline)
E$9  [DL028]  41.91,10.16 90 top  (outside the outline)
E$10  [R0402]  100.33,116.84 0 top  (outside the outline)
E$11  [CRYSTAL-SMD-2.0X1.6MM]  290.83,116.84 90 top  (outside the outline)
E$12  [FN28_M]  201.93,73.66 90 top  (outside the outline)
E$13  [CRYSTAL-SMD-3.2X2.5MM]  228.6,83.82 270 top  (outside the outline)
E$14  [CRYSTAL-SMD-5X3.2-4PAD]  228.6,77.47 180 top  (outside the outline)
E$15  [HC49UP]  165.1,8.89 90 top  (outside the outline)
E$16  [RESONATOR-SMD-7.4X3.4]  228.6,19.05 180 top  (outside the outline)
E$17  [PBS32_M]  231.14,104.14 0 top  (outside the outline)
E$18  [RESONATOR-SMD-4.5X2.0]  228.6,5.08 180 top  (outside the outline)
E$19  [RESONATOR-SMD-3.2X1.3]  242.57,5.08 180 top  (outside the outline)
E$20  [QFN-32]  292.1,6.35 180 top  (outside the outline)
E$21  [PFP80_M]  264.16,43.18 0 top  (outside the outline)
E$22  [QFN-40]  292.1,19.05 180 top  (outside the outline)
E$23  [PM064_M]  170.18,137.16 0 top  (outside the outline)
E$24  [QFN-44]  293.37,146.05 180 top  (outside the outline)
E$25  [PT48_M]  137.16,105.41 0 top  (outside the outline)
E$26  [PW028]  40.64,73.66 90 top  (outside the outline)
E$27  [QFN-44-NOPAD]  303.53,6.35 180 top  (outside the outline)
E$28  [RC052_M]  233.68,137.16 90 top  (outside the outline)
E$29  [RGE24_M]  101.6,5.08 180 top  (outside the outline)
E$30  [RGV16_M]  101.6,20.32 180 top  (outside the outline)
E$31  [RGW20_M]  113.03,5.08 180 top  (outside the outline)
E$32  [RSA16_M]  101.6,12.7 180 top  (outside the outline)
E$33  [QFN-48]  293.37,134.62 180 top  (outside the outline)
E$34  [APDS-9960]  290.83,100.33 270 top  (outside the outline)
E$35  [BGA8DS]  259.08,132.08 180 top  (outside the outline)
E$36  [CHIPLED-6]  290.83,111.76 180 top  (outside the outline)
E$37  [WA014]  72.39,10.16 90 top  (outside the outline)
E$38  [16LCSP]  134.62,83.82 0 top  (outside the outline)
E$39  [085CS_1AR]  135.89,142.24 0 top  (outside the outline)
E$40  [085CS_1R]  137.16,133.35 0 top  (outside the outline)
E$42  [140CLH-0810]  262.89,82.55 0 top  (outside the outline)
E$43  [140CLH-1010]  262.89,71.12 0 top  (outside the outline)
E$44  [R0805]  163.83,43.18 0 top  (outside the outline)
E$45  [CHIPLED_0805]  290.83,85.09 270 top  (outside the outline)
E$46  [DFN-10]  298.45,100.33 270 top  (outside the outline)
E$47  [HIH-4030]  262.89,19.05 90 top  (outside the outline)
E$48  [153CLV-0405]  260.35,115.57 0 top  (outside the outline)
E$49  [153CLV-0505]  260.35,107.95 0 top  (outside the outline)
E$50  [153CLV-0605]  260.35,100.33 0 top  (outside the outline)
E$51  [CHIPLED_0805]  290.83,82.55 270 top  (outside the outline)
E$52  [LCC-8]  259.08,6.35 270 top  (outside the outline)
E$53  [CHIPLED_0805]  290.83,80.01 270 top  (outside the outline)
E$54  [1812]  166.37,109.22 0 top  (outside the outline)
E$55  [LFCSP-16-3X3]  273.05,132.08 180 top  (outside the outline)
E$56  [A/3216-18R]  171.45,35.56 0 top  (outside the outline)
E$58  [B/3528-21R]  166.37,116.84 180 top  (outside the outline)
E$59  [B/3528-21W]  179.07,35.56 0 top  (outside the outline)
E$60  [BMP085]  260.35,147.32 0 top  (outside the outline)
E$61  [BTN_CK_KSS]  134.62,48.26 0 top  (outside the outline)
E$62  [C/6032-28R]  196.85,43.18 0 top  (outside the outline)
E$67  [LFCSP-16-4X4]  306.07,133.35 180 top  (outside the outline)
E$68  [LGA-8-2.5X2.5]  290.83,106.68 180 top  (outside the outline)
E$70  [C1310]  163.83,46.99 0 top  (outside the outline)
E$71  [LGA-12]  306.07,100.33 180 top  (outside the outline)
E$72  [C1812]  209.55,36.83 0 top  (outside the outline)
E$73  [TEMT6000]  265.43,132.08 90 top  (outside the outline)
E$74  [T5403]  259.08,138.43 0 top  (outside the outline)
E$75  [SOT23-3]  115.57,67.31 0 top  (outside the outline)
E$76  [C4532]  165.1,77.47 180 top  (outside the outline)
E$77  [C4564]  177.8,71.12 0 top  (outside the outline)
E$80  [CHIPLED_1206]  196.85,53.34 90 top  (outside the outline)
E$81  [SHT1X]  271.78,6.35 90 top  (outside the outline)
E$82  [CTS406]  228.6,68.58 0 top  (outside the outline)
E$83  [D/7343-31W]  167.64,100.33 0 top  (outside the outline)
E$84  [D/7343-31R]  196.85,36.83 0 top  (outside the outline)
E$85  [DFN-6]  101.6,53.34 90 top  (outside the outline)
E$86  [CHIPLED_0805]  290.83,77.47 270 top  (outside the outline)
E$87  [LCC20]  200.66,137.16 0 top  (outside the outline)
E$88  [MC14093B-TSSOP14]  113.03,38.1 90 top  (outside the outline)
E$89  [MM20SS]  240.03,68.58 0 top  (outside the outline)
E$90  [MM39SL]  177.8,8.89 90 top  (outside the outline)
E$91  [MSOP10]  101.6,43.18 270 top  (outside the outline)
E$92  [PUSHBUTTON_SMD_SJ]  134.62,38.1 0 top  (outside the outline)
E$93  [QFN28-ML_6X6MM]  134.62,69.85 270 top  (outside the outline)
E$94  [QFN20]  134.62,77.47 270 top  (outside the outline)
E$95  [R0402]  163.83,53.34 0 top  (outside the outline)
E$96  [R0603]  163.83,50.8 0 top  (outside the outline)
E$98  [CHIPLED_0805]  290.83,74.93 270 top  (outside the outline)
E$99  [CHIPLED_0805]  290.83,72.39 270 top  (outside the outline)
E$100  [CHIPLED_0805]  290.83,69.85 270 top  (outside the outline)
E$101  [R2010]  196.85,48.26 0 top  (outside the outline)
E$103  [R2512]  165.1,69.85 180 top  (outside the outline)
E$104  [R3216]  163.83,35.56 0 top  (outside the outline)
E$105  [R3225]  165.1,83.82 0 top  (outside the outline)
E$106  [SO14]  104.14,135.89 270 top  (outside the outline)
E$107  [CHIPLED_0805]  290.83,67.31 270 top  (outside the outline)
E$108  [CHIPLED_0603]  290.83,52.07 270 top  (outside the outline)
E$109  [SO18W]  41.91,41.91 90 top  (outside the outline)
E$110  [CHIPLED_0603]  290.83,49.53 270 top  (outside the outline)
E$111  [CHIPLED_0603]  290.83,46.99 270 top  (outside the outline)
E$112  [SOT23]  100.33,76.2 0 top  (outside the outline)
E$113  [SOT23-5L]  100.33,83.82 0 top  (outside the outline)
E$114  [SOT23-6]  100.33,67.31 0 top  (outside the outline)
E$115  [SOT23-R]  107.95,67.31 0 top  (outside the outline)
E$116  [SQFP-S-5X5-48]  72.39,135.89 0 top  (outside the outline)
E$117  [SQFP-S-7X7-48]  73.66,105.41 0 top  (outside the outline)
E$118  [SSOP28]  72.39,73.66 270 top  (outside the outline)
E$119  [TQFP44]  200.66,10.16 270 top  (outside the outline)
E$120  [TQFP32-08]  200.66,104.14 270 top  (outside the outline)
E$121  [TSSOP28]  72.39,40.64 90 top  (outside the outline)
E$122  [U.FL]  135.89,19.05 90 top  (outside the outline)
E$123  [UMAX10]  101.6,38.1 90 top  (outside the outline)
E$124  [USB-MINIB]  137.16,8.89 180 top  (outside the outline)
E$125  [VFSOP-8]  101.6,49.53 90 top  (outside the outline)
E$126  [WS2812]  228.6,38.1 90 top  (outside the outline)
E$127  [WS2812B]  228.6,50.8 90 top  (outside the outline)
E$128  [XTAL3215]  166.37,21.59 180 top  (outside the outline)
E$129  [CHIPLED_0603]  290.83,44.45 270 top  (outside the outline)
E$130  [CHIPLED_0603]  290.83,41.91 270 top  (outside the outline)
E$131  [CHIPLED_0603]  290.83,39.37 270 top  (outside the outline)
E$132  [CHIPLED_0603]  290.83,36.83 270 top  (outside the outline)
E$133  [CHIPLED_0603]  290.83,34.29 270 top  (outside the outline)
E$134  [R0402]  100.33,114.3 0 top  (outside the outline)
E$135  [R0402]  100.33,111.76 0 top  (outside the outline)
E$136  [R0402]  100.33,109.22 0 top  (outside the outline)
E$137  [R0402]  100.33,106.68 0 top  (outside the outline)
E$138  [R0402]  100.33,104.14 0 top  (outside the outline)
E$139  [R0402]  100.33,101.6 0 top  (outside the outline)
E$140  [R0402]  100.33,99.06 0 top  (outside the outline)

## Library data of the parts
E$1-E$7 E$9 E$12 E$17 E$21 E$23 E$25 E$26 E$28-E$32 E$37 = Texas Instruments Footprints
E$8 = SparkFun-IC-Memory
E$10 E$38-E$40 E$42-E$45 E$48-E$51 E$53 E$54 E$56 E$58-E$62 E$70 E$72 E$76 E$77 E$80 E$82-E$96 E$98-E$101 E$103-E$140 = adafruit
E$11 E$13-E$16 E$18 E$19 = SparkFun-Clocks
E$20 E$22 E$24 E$27 E$33 = SparkFun-IC-Microcontroller
E$34-E$36 E$46 E$47 E$52 E$55 E$67 E$68 E$71 E$73-E$75 E$81 = SparkFun-Sensors